# Altium PCB PCB_FICO-44.pcbdoc
Units mil, origin at the board's own origin, x right, y up, seen from the top; angles counter-clockwise.
Board outline 2980 x 2840 mil, 2 copper layers (Top Layer, Bottom Layer); 37 components, 26 nets, 162 pads, 84 vias.
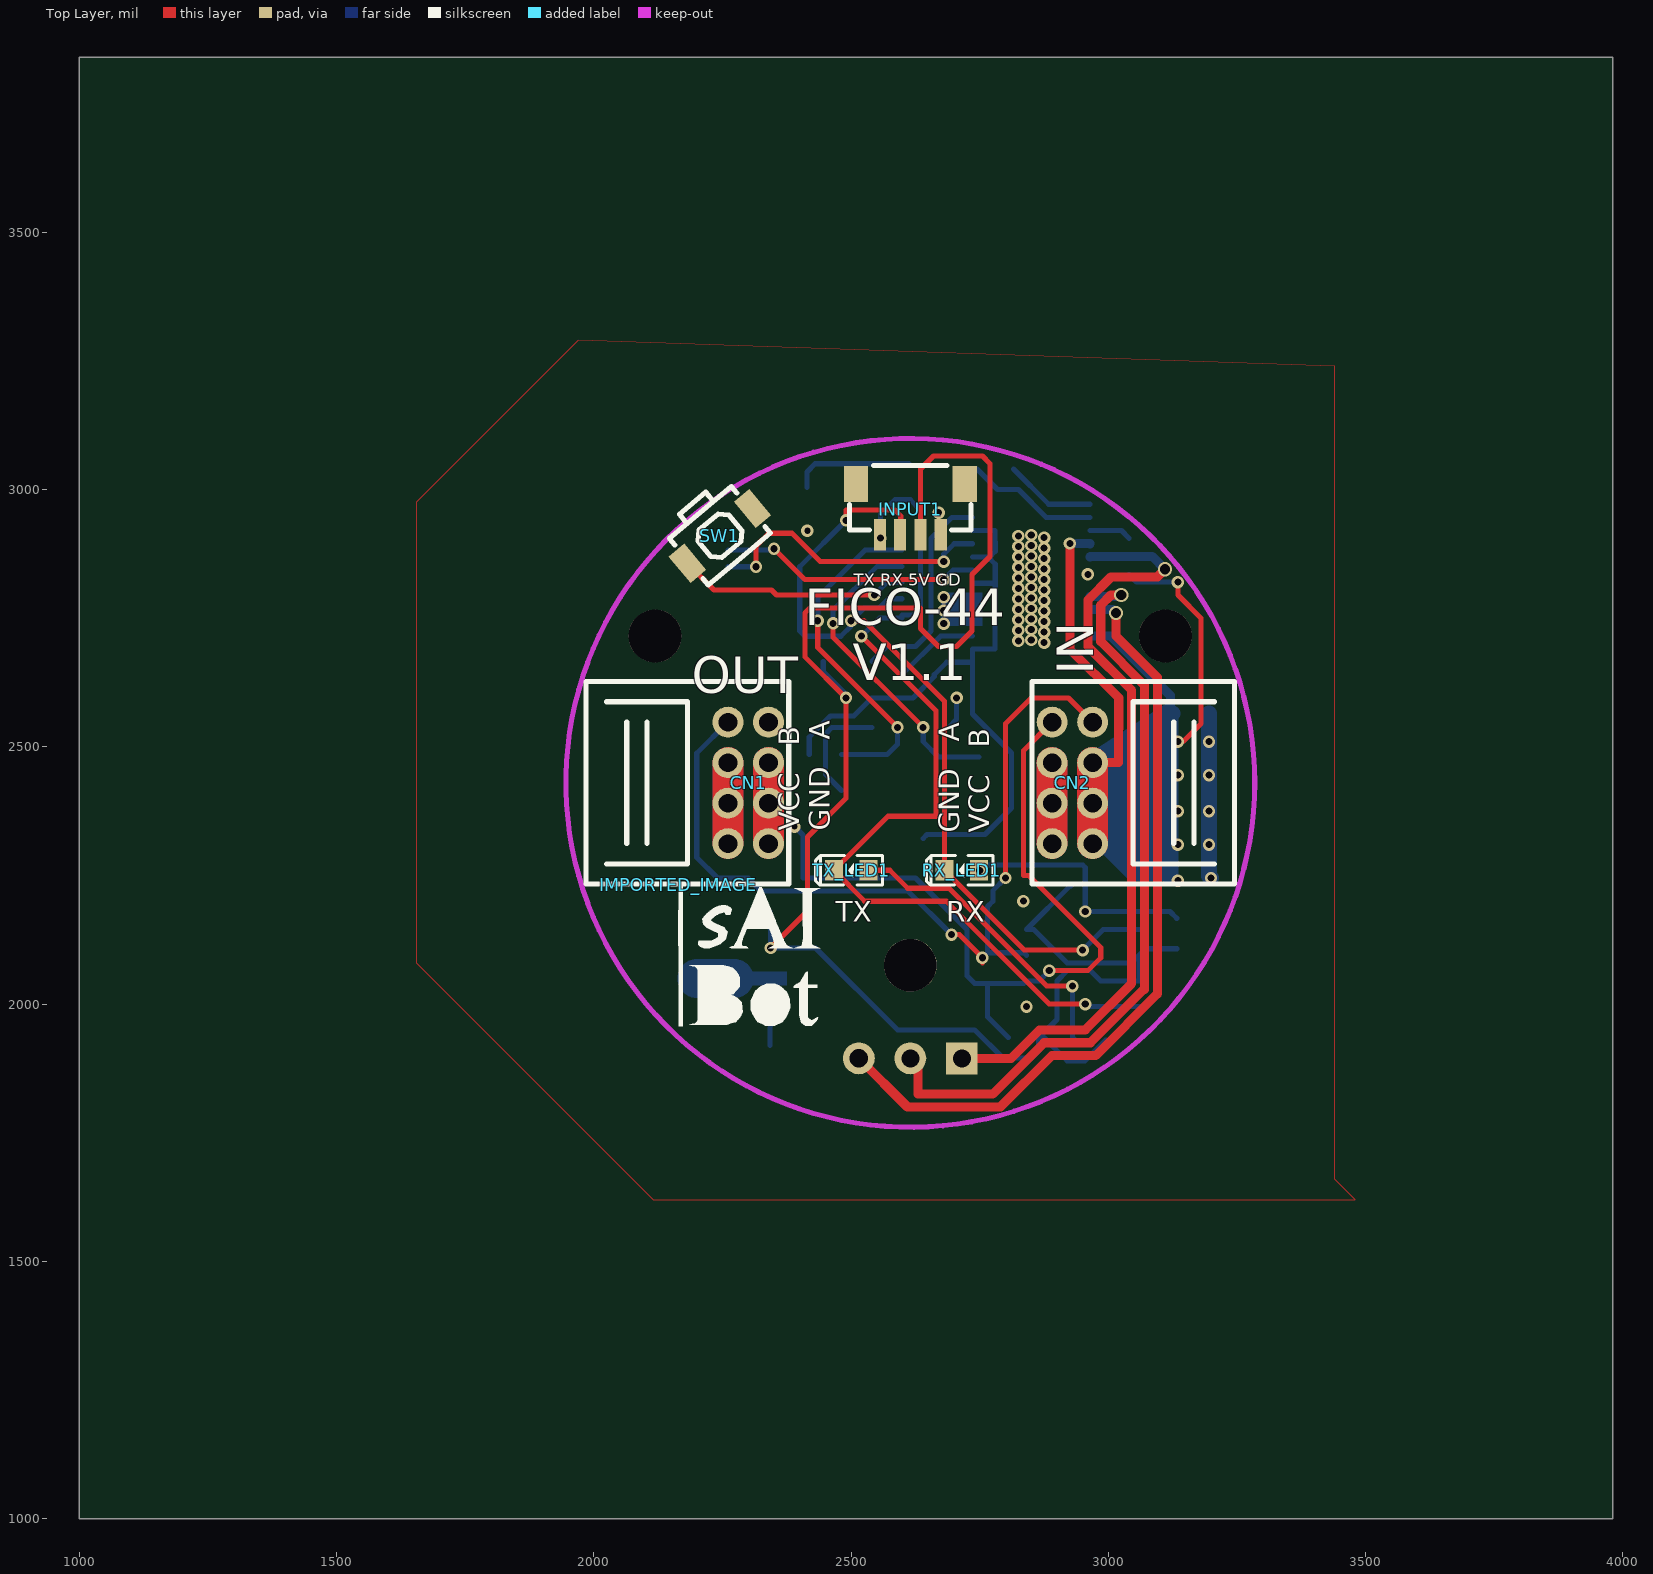
[diagram p0: Top Layer view]
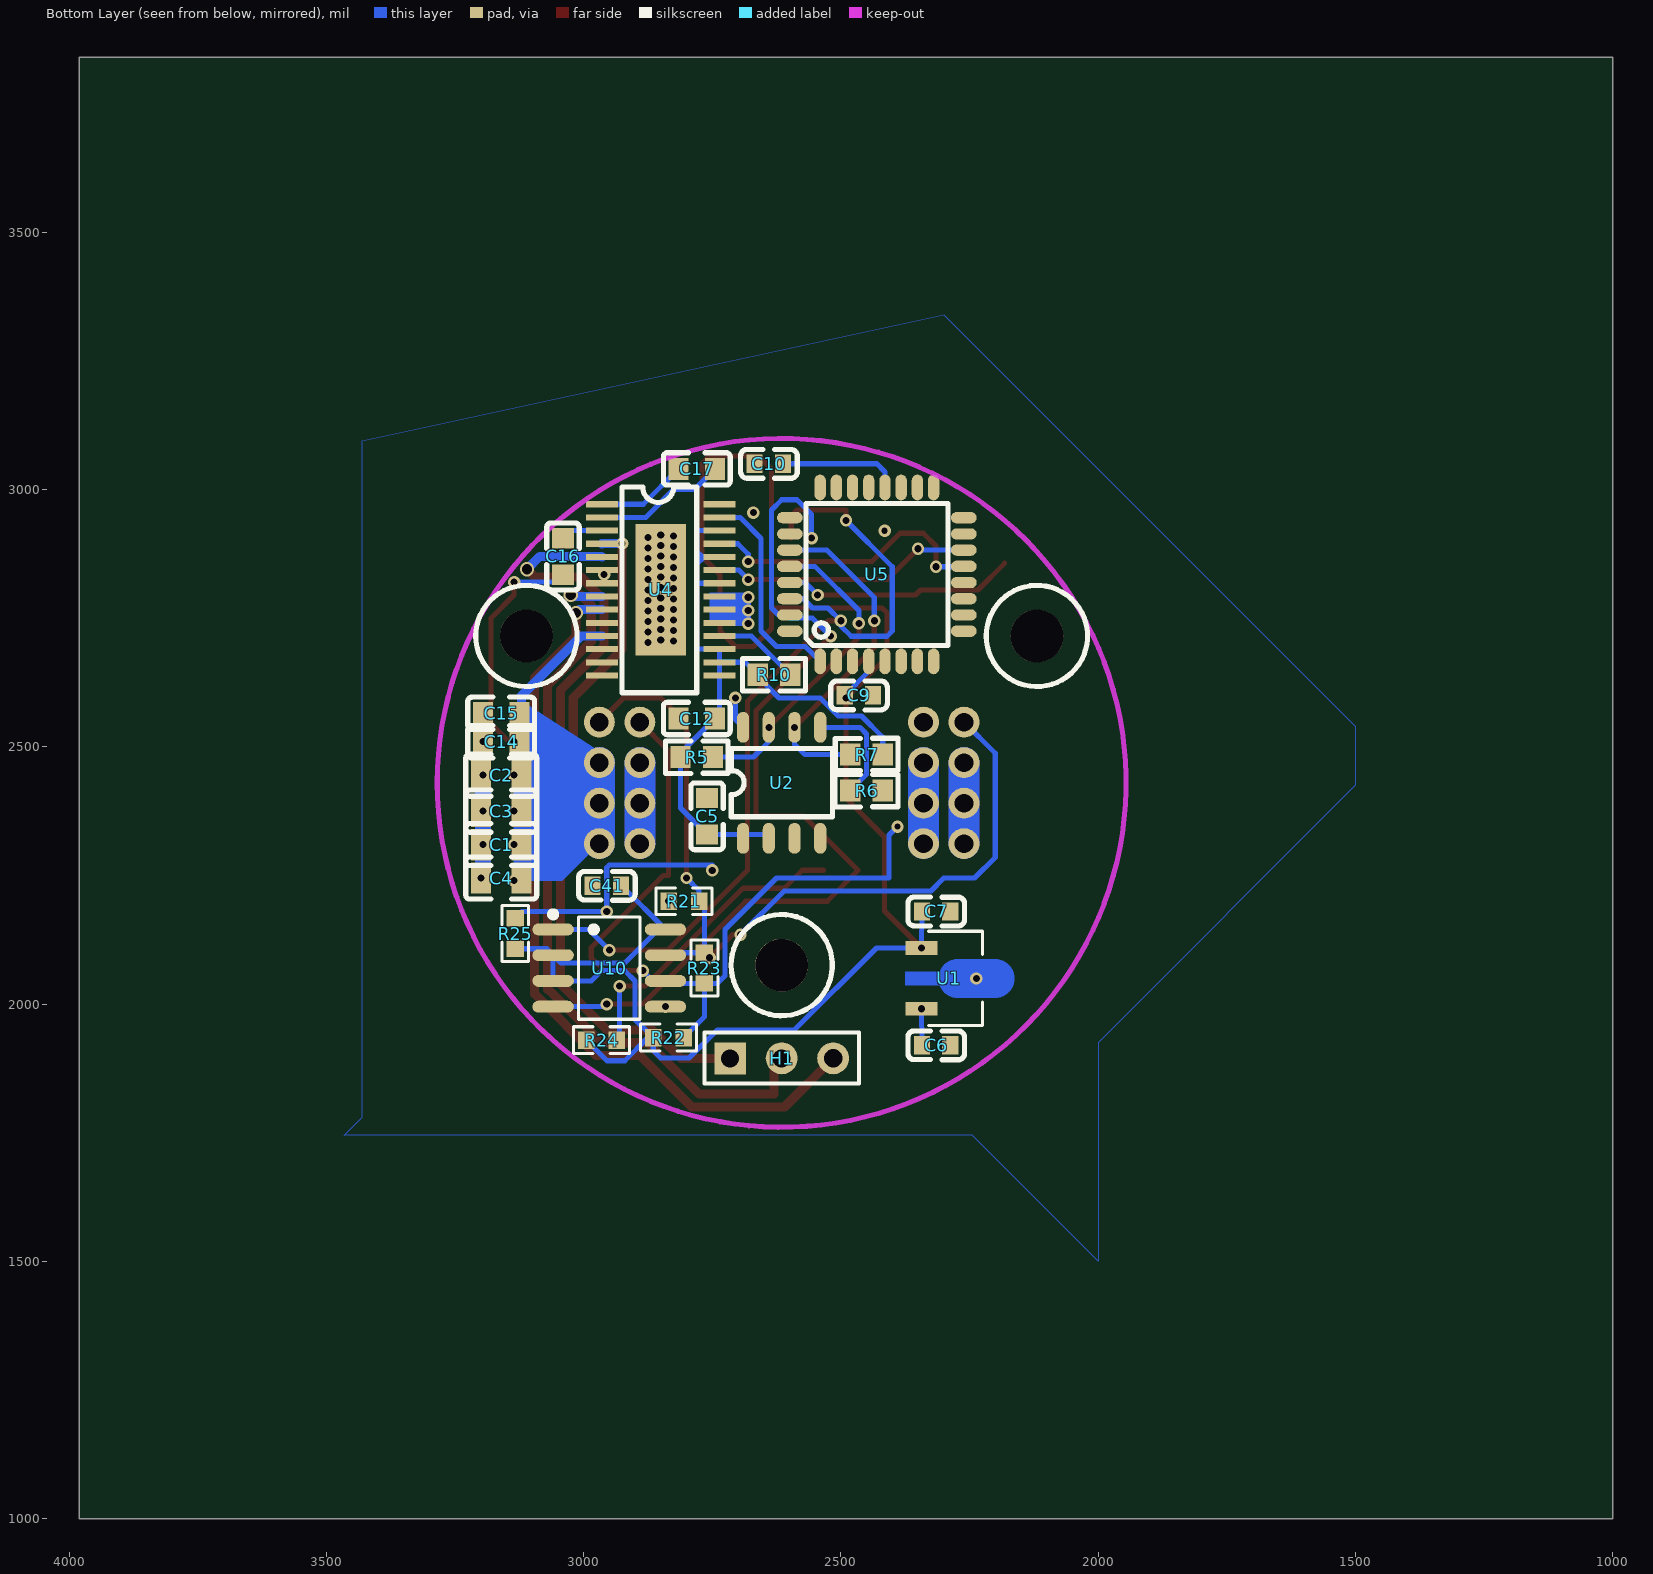
[diagram p1: Bottom Layer view, seen from below]

## Layer stack, top to bottom
Top Layer: signal copper (thickness not stored)
Dielectric: dielectric 12.6, FR-4, Dk 4.8
Bottom Layer: signal copper (thickness not stored)

## Board outline
3980,1000 1000,1000 1000,3840 3980,3840

## Components (designator, comment, footprint, x,y, rotation, side; value= is the part's Value field where it differs from the comment)
C1 "22u" C0805 3160,2310 r0 bottom
C2 "22u" C0805 3160,2445 r0 bottom
C3 "22u" C0805 3160,2375 r0 bottom
C4 "22u" C0805 3160,2245 r0 bottom
C5 "0.1u" C0603#1 2760,2365 r90 bottom
C6 "0.47u" C0603#2 2315,1920 r180 bottom
C7 "0.1u" C0603#2 2315,2180 r180 bottom
C9 "10uF" C0603#2 2465,2600 r180 bottom
C10 "100nF" C0603#2 2640,3050 r180 bottom
C12 "0.47u" C0603#1 2780,2555 r180 bottom
C14 "0.1u" C0603#1 3160,2510 r0 bottom
C15 "0.1u" C0603#1 3160,2565 r180 bottom
C16 "0.1u" C0603#1 3040,2870 r270 bottom
C17 "0.01u" C0603#1 2780,3040 r180 bottom
C41 "0.1u" C0603#2 2955,2230 r180 bottom
CN1 "PHD2.0-2*4AW bend" CONN-TH_PH-D-2-4AWD 2300.04,2430 r270 top
CN2 "PHD2.0-2*4AW bend" CONN-TH_PH-D-2-4AWD 2929.96,2430 r90 top
H1 "HDR-F-2.54_1x3" HDR-F-2.54_1X3 2615,1894.57 r0 bottom
IMPORTED_IMAGE "IMPORTED_IMAGE" IMPORTED_IMAGE 2164.44,2232.41 r0 top
INPUT1 "SH1.0-4P" SH1.0-4P_立贴 2615,2961.5 r180 top
R5 "4.7k" R0603#1 2780,2480 r180 bottom
R6 "1K" R0603#1 2450,2415 r180 bottom
R7 "4.7k" R0603#1 2450,2485 r0 bottom
R10 "10K" R0603#1 2630,2640 r0 bottom
R21 "4.7k" R0603#2 2805,2200 r0 bottom
R22 "4.7k" R0603#2 2835,1935 r0 bottom
R23 "120R" R0603#2 2765,2070 r270 bottom
R24 "1k" R0603#2 2965,1930 r180 bottom
R25 "1k" R0603#2 3132.89,2137.11 r90 bottom
RX_LED1 "LED-0603_R" LED0603_RED 2715,2260 r180 top
SW1 "ST-1186S" SW-SMD_ST-1186S 2245,2910 r310 top
TX_LED1 "LED-0603_R" LED0603_RED 2500,2260 r180 top
U1 "L78L05ACUTR" SOT-89-3_L4.5-W2.5-P1.50-LS4.2-TL 2290,2050 r0 bottom
U2 "AS5600-ASOM" SOIC-8_L5.0-W4.0-P1.27-LS6.0-BL 2615,2430 r0 bottom
U4 "DRV8313PWPR" HTSSOP-28_L9.8-W4.5-P0.65-LS6.6-BL-EP 2850,2805 r90 bottom
U5 "LGT8F328P-QFP32L" TQFP32-08-CHECKOK 2430,2835 r270 bottom
U10 "MAX13487EESA" SOIC-8_L4.9-W3.9-P1.27-LS6.0-BL 2950,2070 r90 bottom

## Footprints (in the part's own frame and the unit in brackets; to place one, negate y for a bottom-side part, rotate by r counter-clockwise, add the part's x,y. Pads: shape width x height; smd on the part's side, far side on the other; paste and mask are expansions set on the pad)
C0603#1 [mm]
  rect 1x1.1 smd: 1(0.9,0) 2(-0.9,0)
  silkscreen extent -1.65,-0.8 1.65,0.8
C0603#2 [mm]
  rect 0.8x0.9 smd: 1(0.7,0) 2(-0.7,0)
  silkscreen extent -1.39,-0.72 1.41,0.71
C0805 [mm]
  rect 1x1.55 smd: 1(1,0) 2(-1,0)
  silkscreen extent -1.75,-1.04 1.75,1.04
CONN-TH_PH-D-2-4AWD [mil]
  round 60 hole 36: 1(118.1,39.35) 2(118.1,-39.35) 3(39.4,39.35) 4(39.4,-39.35) 5(-39.4,39.35) 6(-39.4,-39.35) 7(-118.1,39.35) 8(-118.1,-39.35)
  silkscreen extent -197,-315 197,79
HDR-F-2.54_1X3 [mil]
  rect 62x62 hole 35: 1(100,0)
  round 62 hole 35: 2(0,0)
  round 62 hole 36: 3(-100,0)
  silkscreen extent -150,-50 150,49
HTSSOP-28_L9.8-W4.5-P0.65-LS6.6-BL-EP [mm]
  rect 0.3x1.6 smd: 1(4.225,2.9) 2(3.575,2.9) 3(2.925,2.9) 4(2.275,2.9) 5(1.625,2.9) 6(0.975,2.9) 7(0.325,2.9) 8(-0.325,2.9) 9(-0.975,2.9) 10(-1.625,2.9) 11(-2.275,2.9) 12(-2.925,2.9) 13(-3.575,2.9) 14(-4.225,2.9) 15(-4.225,-2.9) 16(-3.575,-2.9) 17(-2.925,-2.9) 18(-2.275,-2.9) 19(-1.625,-2.9) 20(-0.975,-2.9) 21(-0.325,-2.9) 22(0.325,-2.9) 23(0.975,-2.9) 24(1.625,-2.9) 25(2.275,-2.9) 26(2.925,-2.9) 27(3.575,-2.9) 28(4.225,-2.9)
  rect 6.5x2.5 smd: 29(0,0)
  silkscreen extent -5.08,-1.78 5.08,1.91
IMPORTED_IMAGE [mil]
  silkscreen extent 0,-276 276,0
LED0603_RED [mm]
  rect 0.9x1 smd: 1(-0.85,0) 2(0.85,0)
  silkscreen extent -1.54,-0.73 1.75,0.73
R0603#1 [mm]
  rect 1x1.1 smd: 1(0.8,0) 2(-0.8,0)
  silkscreen extent -1.55,-0.81 1.55,0.8
R0603#2 [mm]
  rect 0.806x0.864 smd: 1(0.753,0) 2(-0.753,0)
  silkscreen extent -1.39,-0.66 1.39,0.66
SH1.0-4P_立贴 [mm]
  rect 0.6x1.55 smd: 1(-1.501,1.251) 2(-0.501,1.251) 3(0.501,1.249) 4(1.499,1.251)
  rect 1.2x1.8 smd: 5(-2.684,-1.251) 6(2.684,-1.251)
  silkscreen extent -3,-2.16 3,1.02
SOIC-8_L4.9-W3.9-P1.27-LS6.0-BL [mm]
  oval 0.588x2.045 smd: 1(1.905,2.773) 2(0.635,2.773) 3(-0.635,2.773) 4(-1.905,2.773) 5(-1.905,-2.773) 6(-0.635,-2.773) 7(0.635,-2.773) 8(1.905,-2.773)
  silkscreen extent -2.53,-1.52 2.8,2.92
SOIC-8_L5.0-W4.0-P1.27-LS6.0-BL [mm]
  oval 0.6x1.52 smd: 1(1.905,2.74) 2(0.635,2.74) 3(-0.635,2.74) 4(-1.905,2.74) 5(-1.905,-2.74) 6(-0.635,-2.74) 7(0.635,-2.74) 8(1.905,-2.74)
  silkscreen extent -2.5,-1.7 2.49,1.67
SOT-89-3_L4.5-W2.5-P1.50-LS4.2-TL [mm]
  rect 1.575x0.672 smd: 1(1.356,-1.5) 3(1.356,1.5)
  round 0 smd: 2(-1.356,0.009)
  Top Layer region: -2.283,0.959 -0.429,0.959 -0.385,0.958 -0.34,0.955 -0.296,0.949 -0.252,0.942 -0.208,0.933 -0.165,0.921 -0.123,0.908 -0.081,0.893 -0.04,0.875 0,0.856 0.04,0.835 0.078,0.812 0.115,0.788 0.151,0.761 0.185,0.733 0.219,0.704 0.251,0.673 0.281,0.64 0.31,0.606 0.337,0.571 0.362,0.534 0.386,0.497 0.408,0.458 0.428,0.418 0.447,0.339 2.144,0.339 2.144,-0.321 0.447,-0.321 0.428,-0.401 0.408,-0.44 0.386,-0.479 0.362,-0.517 0.337,-0.553 0.31,-0.588 0.281,-0.622 0.251,-0.655 0.219,-0.686 0.185,-0.716 0.151,-0.744 0.115,-0.77 0.078,-0.795 0.04,-0.818 0,-0.839 -0.04,-0.858 -0.081,-0.875 -0.123,-0.89 -0.165,-0.904 -0.208,-0.915 -0.252,-0.925 -0.296,-0.932 -0.34,-0.937 -0.385,-0.94 -0.429,-0.941 -2.283,-0.941 -2.328,-0.94 -2.372,-0.937 -2.416,-0.932 -2.46,-0.925 -2.504,-0.915 -2.547,-0.904 -2.589,-0.89 -2.631,-0.875 -2.672,-0.858 -2.713,-0.839 -2.752,-0.818 -2.79,-0.795 -2.827,-0.77 -2.863,-0.744 -2.898,-0.716 -2.931,-0.686 -2.963,-0.655 -2.993,-0.622 -3.022,-0.588 -3.049,-0.553 -3.075,-0.517 -3.098,-0.479 -3.12,-0.44 -3.141,-0.401 -3.159,-0.36 -3.175,-0.318 -3.189,-0.276 -3.202,-0.233 -3.212,-0.19 -3.22,-0.146 -3.227,-0.102 -3.231,-0.058 -3.233,-0.013 -3.233,0.031 -3.231,0.076 -3.227,0.12 -3.22,0.164 -3.212,0.208 -3.202,0.251 -3.189,0.294 -3.175,0.336 -3.159,0.377 -3.141,0.418 -3.12,0.458 -3.098,0.497 -3.075,0.534 -3.049,0.571 -3.022,0.606 -2.993,0.64 -2.963,0.673 -2.931,0.704 -2.898,0.733 -2.863,0.761 -2.827,0.788 -2.79,0.812 -2.752,0.835 -2.713,0.856 -2.672,0.875 -2.631,0.893 -2.589,0.908 -2.547,0.921 -2.504,0.933 -2.46,0.942 -2.416,0.949 -2.372,0.955 -2.328,0.958
  silkscreen extent -1.65,-2.33 1,2.33
SW-SMD_ST-1186S [mm]
  rect 1.7x1 smd: 1(0,2.1) 2(0,-2.1)
  silkscreen extent -2.1,-2 1.5,2
TQFP32-08-CHECKOK [mil]
  oval 50x22 smd: 1(169,-110.24) 2(169,-78.74) 3(169,-47.24) 4(169,-15.75) 5(169,15.75) 6(169,47.24) 7(169,78.74) 8(169,110.24) 17(-169,110.24) 18(-169,78.74) 19(-169,47.24) 20(-169,15.75) 21(-169,-15.75) 22(-169,-47.24) 23(-169,-78.74) 24(-169,-110.24)
  oval 22x50 smd: 9(110.24,169) 10(78.74,169) 11(47.24,169) 12(15.75,169) 13(-15.75,169) 14(-47.24,169) 15(-78.74,169) 16(-110.24,169) 25(-110.24,-169) 26(-78.74,-169) 27(-47.24,-169) 28(-15.75,-169) 29(15.75,-169) 30(47.24,-169) 31(78.74,-169) 32(110.24,-169)
  silkscreen extent -138,-138 138,138

## Free pads (board coordinates)
  round 102.36 hole 102.36 unplated: ""(2118.94,2715.43) ""(2615,2075.67) ""(3111.06,2715.43)

## Via types
v1: diameter 24.06, hole 13.78, Top Layer to Bottom Layer, 79 vias
v2: diameter 27.56, hole 19.69, Top Layer to Bottom Layer, 3 vias
v3: diameter 24.06, hole 12, Top Layer to Bottom Layer, 2 vias

## Nets (pads, with @x,y where several pads share a name; then routed paths per layer and width w, separated by ;. In a path a pad name is that pad's centre, name@x,y a point inside that pad or via, vN(x,y) a via of type N, cw(c..) or ccw(c..) an arc to the next point about the centre after c; other vN are vias at no path point)
3V3: C5.2 C12.1 R5.2 R7.2 R10.1 U2.1 U2.2 U4.15 U4.16 U4.17 U4.22 U4.24 U4.26 | length 1386.5
  Bottom Layer w10: R7.2 2418.5,2518.5 2460,2560 2505,2560 2540,2595 2620,2595 2661.49,2636.49 R10.1 2685.74,2664.25 U4.16 ; U2.2 2647.43,2329.56 C5.2 2811.5,2381.06 R5.2 2811.5,2488.07 C12.1 2735.83,2563.74 U4.15 U4.17 ; U4.17 2779.8,2689.8 2780,2820 ; U4.24 2769,2869 2780,2880 2779.8,2920.2 U4.26 ; U4.22 2777.8,2817.8 2780,2820 ; U4.24 2766.02,2868.98 2780,2855 2780,2820
+5V: C7.2 C9.2 C41.1 INPUT1.2 R22.1 R24.2 R25.2 U1.1 U5.4 U10.2 U10.3 U10.8 | length 3525.1
  Top Layer w10: v1(2343.4,2109.05) 2415,2180.65 2415,2325 2490,2400 v1(2490,2595) 2410,2675 2410,2760 2420,2770 2635,2770 2635,2730 2670,2695 2705,2695 2735,2725 2735,2835 2770,2870 2770,3050 2755,3065 2660,3065 2634.73,3039.73 INPUT1.2
  Bottom Layer w10: C7.2 U1.1@2343.4,2109.1 ; v1(2343.4,2109.05) 2430.95,2109.05 2590,1950 2740,1950 2795,1895 2850,1895 2864.66,1909.66 R22.1 ; U5.4 2445.75,2646.81 C9.2 ; C41.1 2925.85,2230 U10.8 2855,2145 2920,2080 3044.15,2080 U10.2 ; R24.2 2954.66,1890 2920,1890 2875,1935 R22.1 ; R25.2@3132.89,2107.45 3071.6,2107.45 U10.2 ; R22.1 2900,1970.34 2900,2045 2920,2065 2965,2065 2985,2045 U10.3 U10.2
C16_2: C16.2 U4.3 | length 81.9
  Bottom Layer w10: U4.3 3025.28,2920.16 C16.2
C17_1: C17.1 U4.2 | length 258.6
  Bottom Layer w10: C17.1 2784.57,3000 2825,3000 2879.25,2945.75 U4.2
C17_2: C17.2 U4.1 | length 177.2
  Bottom Layer w10: C17.2 2884.1,2971.34 U4.1
GND: C1.1 C2.1 C3.1 C4.1 C5.1 C6.1 C7.1 C9.1 C10.2 C12.2 C14.1 C15.2 C41.2 CN1.1 CN1.3 CN1.5 CN2.3 CN2.5 CN2.7 INPUT1.1 INPUT1.5 INPUT1.6 R6.1 R21.1 SW1.1 U1.2 U2.4 U2.8 U4.6 U4.7 U4.10 U4.12 U4.13 U4.14 U4.19 U4.20 U4.21 U4.28 U4.29 U5.5 U10.5 | length 1015
  Top Layer w60: CN1.1 CN1.5 ; CN2.7 CN2.3
  Bottom Layer w10: U2.8 2705,2552.87 v1(2705,2595)
  Bottom Layer w31.5: C15.2 v1(3195.44,2510) 3195.44,2248.93 v1(3199.37,2245)
  Bottom Layer w60: CN1.1 CN1.5 ; CN2.7 CN2.3
  other v1: 2840.85,1995 2236.6,2049.65 2834.66,2200 3195.44,2310 3195.44,2375 3195.44,2445 2875,2702.6 2825,2705.8 2850,2707.6 2875,2723 2825,2726.2 2850,2728 2680,2739.4 2875,2743.4 2825,2746.6 2850,2748.4 2875,2763.8 2680,2765 2825,2767 2850,2768.8 2875,2784.2 2825,2787.4 2850,2789.2 2680,2790.59 2875,2804.6 2825,2807.8 2850,2809.6 2875,2825 2825,2828.2 2850,2830 2960,2835 2875,2845.4 2825,2848.6 2850,2850.4 2875,2865.8 2825,2869 2850,2870.8 2875,2886.2 2825,2889.4 2850,2891.2 2875,2906.6 2825,2909.8 2850,2911.6 2670,2955
  other v3: 2415,2920
PWM1: U4.27 U5.1 | length 416.9
  Bottom Layer w10: U5.1 2569.2,2695 2625,2695 2655,2725 2655,2905 2695.7,2945.7 U4.27@2735.8,2945.7
PWM2: U4.25 U5.13 | length 570.9
  Top Layer w10: v1(2315,2850) 2315,2890 2340,2915 2385,2915 2440,2860 v1(2680,2860)
  Bottom Layer w10: U5.13 2261.75,2850 v1(2315,2850) ; v1(2680,2860) 2680,2874.2 2700.4,2894.6 U4.25
PWM3: U4.23 U5.14 | length 510.1
  Top Layer w10: v1(2350,2885) 2410,2825 v1(2680,2825)
  Bottom Layer w10: U5.14 2350,2882.2 v1(2350,2885) ; v1(2680,2825) 2698.39,2843.39 U4.23
R10_2: R10.2 U4.18 | length 168.6
  Bottom Layer w10: R10.2 2673.93,2715.43 U4.18
R24_1: R24.1 TX_LED1.1 | length 596.9
  Top Layer w10: TX_LED1.1 2575,2260 2610,2225 2690,2225 2880,2035 v1(2930,2035)
  Bottom Layer w10: v1(2930,2035) 2930,1935.34 R24.1
R25_1: R25.1 RX_LED1.1 | length 485.4
  Bottom Layer w10: v1(2750,2260) 2750,2270 2950,2270 2955,2265 2955,2260 v1(2955,2180) 3119.65,2180 R25.1
RS485_A: CN1.7 CN2.1 R22.2 R23.1 U10.6 | length 2256.9
  Top Layer w10: v1(2885,2065) 2960,2065 2985,2090 2985,2110 2845,2250 2835,2250 2835,2492.49 CN2.1
  Mid-Layer 1 w10: CN1.7 2352.49,2535 2390,2535 v3(2390,2345)
  Bottom Layer w10: v3(2390,2345) 2406.29,2328.71 2406.29,2245 ; R22.2 2765,1975.34 R23.1 ; v1(2885,2065) 2865,2045 U10.6 2836.19,2040.34 R23.1 ; 2406.29,2245 2625,2245 ; 2406.29,2245 2625,2245 ; 2625,2245 2725,2145 ; 2625,2245 2725,2145 ; 2725,2055 2725,2145 ; 2725,2055 2739.66,2040.34 ; 2725,2055 2739.66,2040.34 ; 2725,2055 2725,2145 ; 2739.66,2040.34 R23.1 ; 2739.66,2040.34 R23.1
RS485_B: CN1.8 CN2.2 R21.2 R23.2 U10.7 | length 1681.1
  Top Layer w10: v1(2695,2135) 2710,2135 v1(2755,2090) v1@2755,2080 ; v1(2800,2245) 2800,2545 2850,2595 2922.41,2595 CN2.2
  Bottom Layer w10: CN1.8 2200,2487.41 2200,2285 2240,2245 2300,2245 2325,2220 2610,2220 v1(2695,2135) ; v1(2800,2245) 2775.34,2220.34 R21.2 2765,2189.66 R23.2 2836.19,2099.66 U10.7
RST: SW1.2 U5.29 | length 453
  Top Layer w10: SW1.2 2233.53,2805 2345,2805 2355,2795 v1(2545,2795)
  Bottom Layer w10: v1(2545,2795) 2569.25,2819.25 U5.29
RX: INPUT1.3 RX_LED1.2 U5.30 U10.1 | length 1698.7
  Top Layer w10: v1(2490,2940) 2490,2960 2585,2960 2596.3,2948.7 INPUT1.3@2596.3,2905.6 ; v1(2500,2745) 2525,2745 2681.5,2588.5 RX_LED1.2 ; RX_LED1.2 2836.54,2105 v1(2950,2105)
  Bottom Layer w10: v1(2490,2940) 2400,2850 2400,2725 2410,2715 2480,2715 2500,2735 v1(2500,2745) 2525,2770 2555,2770 2572.76,2787.76 U5.30 ; v1(2950,2105) 2990,2145 U10.1
S$1590: 
SCL: R5.1 U2.7 U5.28 | length 617.9
  Top Layer w10: v1(2465,2740) 2465,2712.87 v1(2640,2537.87)
  Bottom Layer w10: v1(2465,2740) 2465,2765 2550.75,2850.75 U5.28 ; v1(2640,2537.87) 2640,2510 2670,2480 R5.1
SDA: R7.1 U2.6 U5.27 | length 668.2
  Top Layer w10: v1(2435,2745) 2435,2692.87 v1(2590,2537.87)
  Bottom Layer w10: v1(2435,2745) 2435,2790 2527.24,2882.24 U5.27 ; R7.1 2570,2485 2590,2505 v1(2590,2537.87)
TX: INPUT1.4 TX_LED1.2 U5.31 U10.4 | length 1830.2
  Top Layer w10: TX_LED1.2 2526.5,2200 2685,2200 2885,2000 v1(2955,2000) ; TX_LED1.2 2571.54,2365 2665,2365 2665,2570 v1(2520,2715)
  Bottom Layer w10: v1(2520,2715) 2555,2750 2599,2750 U5.31 2621.26,2756.26 2635,2770 2635,2960 2615,2980 2585,2980 2556.89,2951.89 v1(2556.89,2905.63) ; v1(2955,2000) 2960,1995 U10.4
U: H1.1 U4.5 | length 1501.9
  Top Layer w17.72: H1.1 2810.9,1894.6 2866.4,1950 2955,1950 3045,2040 3045,2610 2960,2695 2960,2785 3005,2830 3095,2830 v2(3110,2845)
  Bottom Layer w17.72: U4.5 2965.19,2870 3085,2870 v2(3110,2845)
U2_5: R6.2 U2.5 | length 218.4
  Bottom Layer w10: R6.2 2450,2446.5 2450,2525 2462.87,2537.87 U2.5
U5_20: C10.1 U5.20 | length 235
  Bottom Layer w10: U5.20 2414.25,3034.25 2430,3050 C10.1
V: H1.2 U4.8 | length 1492
  Top Layer w17.72: H1.2 2630,1879.6 2630,1825 2775,1825 2875,1925 2965,1925 3068.6,2028.6 3070,2028.6 3070,2620 2985,2705 2985,2775 3005,2795 v2(3025,2795)
  Bottom Layer w17.72: U4.8 3022.21,2792.21 v2(3025,2795)
VCC: C1.2 C2.2 C3.2 C4.2 C6.2 C14.2 C15.1 C16.1 CN1.2 CN1.4 CN1.6 CN2.4 CN2.6 CN2.8 U1.3 U4.4 U4.11 | length 2390
  Top Layer w10: v1(3135,2510) 3145,2510 3180,2545 3180,2750 3135,2795 v1(3135,2820)
  Top Layer w17.72: v1(2925,2895) 2925,2690 3020,2595 3019.4,2469.4 CN2.4
  Top Layer w60: CN1.2 CN1.6 ; CN2.8 CN2.4
  Bottom Layer w10: C6.2 v1(2343.4,1990.9) ; C16.1 3054.57,2820 v1(3135,2820)
  Bottom Layer w17.72: v1(2925,2895) 2963.74,2895 U4.4 ; U4.11 3004.57,2715.43 3120.63,2599.37 C2.2
  Bottom Layer w31.5: C4.2 3120.63,2561.06 C15.1
  Bottom Layer w60: CN1.2 CN1.6 ; CN2.8 CN2.4
  other v1: 3135,2240 3135,2310 3135,2375 3135,2445
W: H1.3 U4.9 | length 1537
  Top Layer w17.72: H1.3 2609.6,1800 2790,1800 2890,1900 2975,1900 3095,2020 3095,2635 3015,2715 v2(3015,2760)
  Bottom Layer w17.72: U4.9 3008.38,2766.62 v2(3015,2760)
pads on no net: U2.3 U5.2 U5.3 U5.6 U5.7 U5.8 U5.9 U5.10 U5.11 U5.12 U5.15 U5.16 U5.17 U5.18 U5.19 U5.21 U5.22 U5.23 U5.24 U5.25 U5.26 U5.32

## Polygon pours and split planes (outlines as drawn)
GND on Bottom Layer (solid): 2300,3340 1500,2540 1500,2425 2000,1925 2000,1500 2245,1745 3465,1745 3430,1780 3430,3095
GND on Mid-Layer 2 (solid): 2090,3165 1595,2670 1595,2595 1610,2580 1610,1660 1695,1575 3385,1575 3345,1615 3345,3215
VCC on Mid-Layer 1 (solid): 1855,3120 1685,2950 1685,2020 2155,1550 2155,1535 2325,1705 3475,1705 3345,1835 3345,3225
GND on Top Layer (solid): 1970,3290 1655,2975 1655,2080 2115,1620 3480,1620 3440,1660 3440,3240

## Keep-outs
Keep-Out Layer:
  circle w10 net S$1590: c2615,2430 r669.29

## Other copper
Mid-Layer 1:
  rectangle net VCC: 2930,2270 3015,2505
  rectangle net VCC: 2205,2260 2295,2500
Mid-Layer 2:
  rectangle net GND: 2300,2265 2365,2505
  rectangle net GND: 2840,2270 2930,2510
Bottom Layer:
  region net VCC: 3120.63,2590 2975,2495 2969.31,2390.6 2969.31,2311.9 3041.21,2240 3135,2240 3135,2375
  rectangle net GND: 2675,2735 2755,2800

## Silkscreen, mask and mechanical layers (free items; w line width, h text height)
Top Overlay:
  text "TX RX 5V GD" at 2505,2813.19 h23.62
  text "IN" at 2970.43,2640 h70.87 r90
  text "FICO-44 /    V1.1" at 2410,2629.57 h70.87
  text "OUT" at 2190,2604.57 h70.87
  text "VCC   B / GND   A" at 2458.03,2336.76 h39.37 r90
  text "GND   A / VCC   B" at 2768.86,2333.38 h39.37 r90
  text "TX" at 2470,2160.32 h39.37
  text "RX" at 2685,2160.32 h39.37
Bottom Overlay:
  circle w10: c2118.94,2715.43 r98.43
  circle w10: c2615,2075.67 r98.43
  circle w10: c3111.06,2715.43 r98.43